# Altium PCB amplifier sp.PcbDoc
Units mil, origin at the board's own origin, x right, y up, seen from the top; angles counter-clockwise.
Board outline 708.66 x 1338.58 mil, 2 copper layers (Top Layer, Bottom Layer); 37 components, 29 nets, 115 pads, 41 vias.
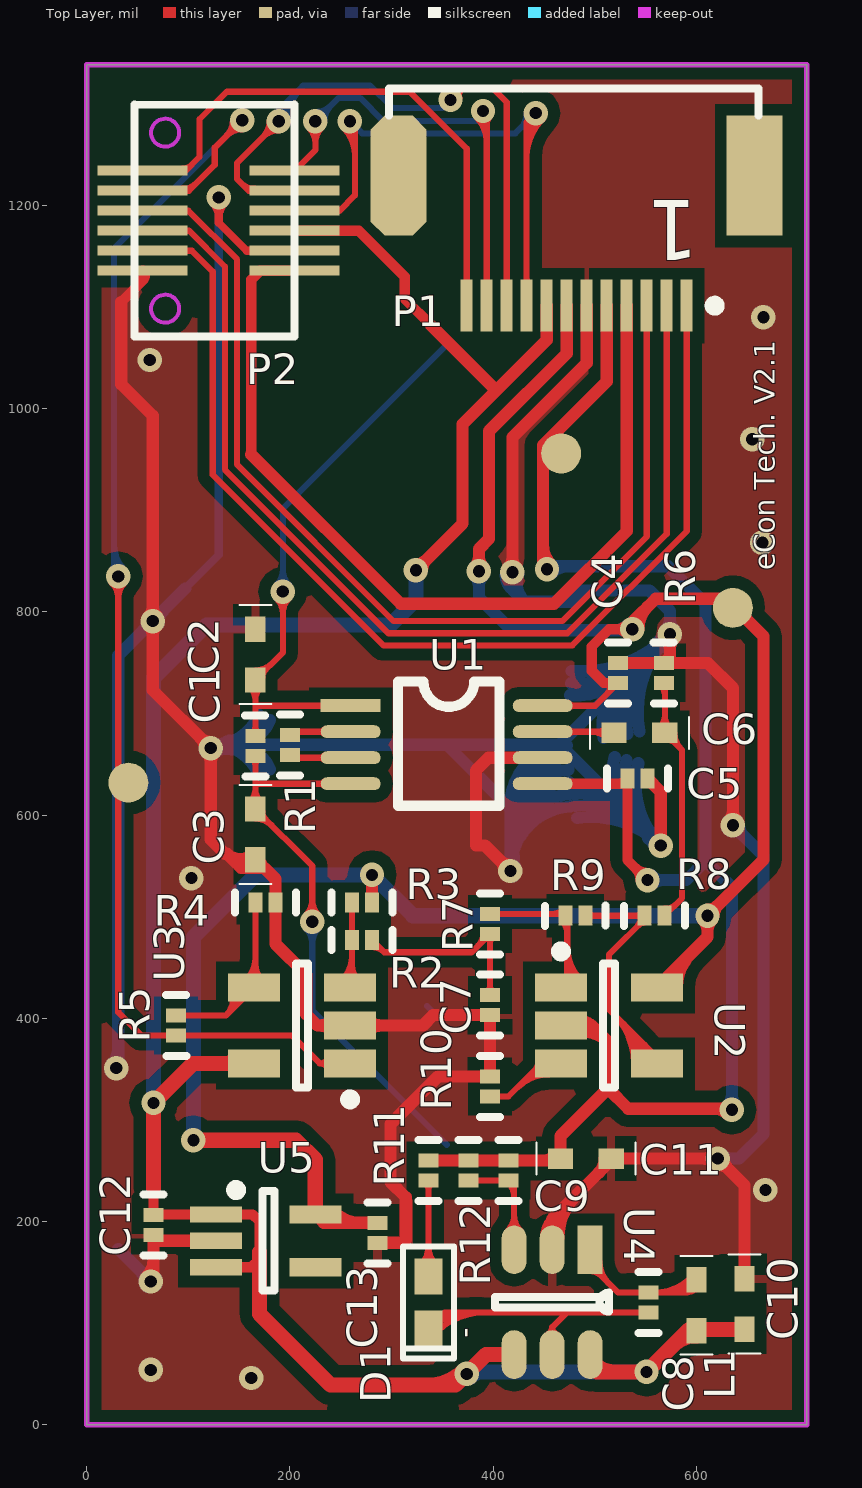
[diagram p0: Top Layer view]
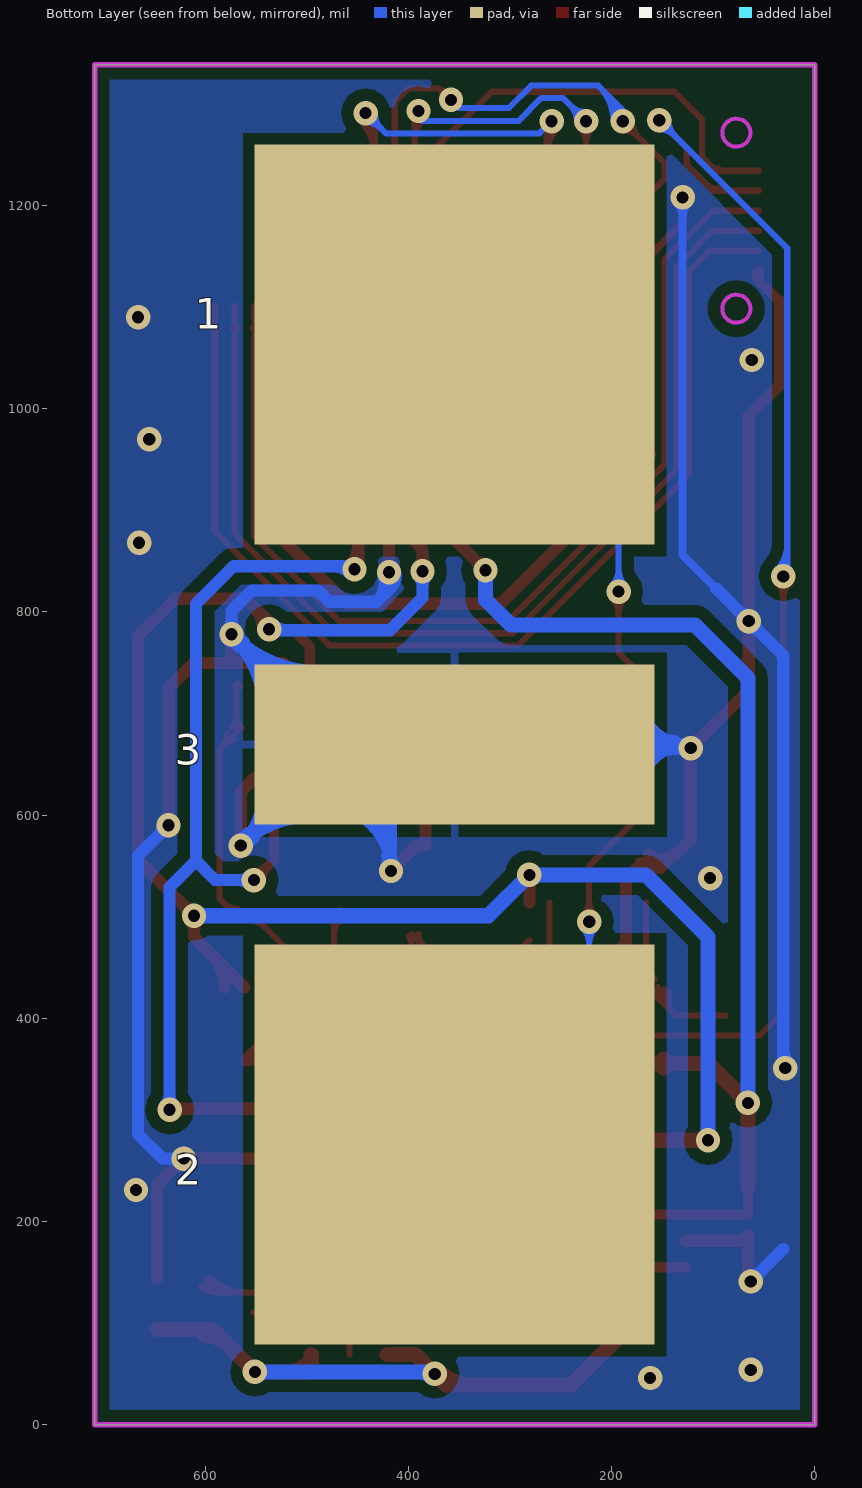
[diagram p1: Bottom Layer view, seen from below]

## Layer stack, top to bottom
Top Layer: signal copper 1.4
Dielectric: dielectric 12.6, FR-4, Dk 4.8
Bottom Layer: signal copper 1.4

## Board outline
0,0 708.66,0 708.66,1338.58 0,1338.58

## Design rules (kind name [scope] priority, off if disabled: settings)
AssemblyTestPointUsage [All] p1 off:
AssemblyTestpoint [All] p1 off: testpointundercomponent=TRUE minsize=40 maxsize=100 preferedsize=60 minholesize=0 maxholesize=40 preferedholesize=32 testpointgrid=1 usegrid=TRUE gridtolerance=0.01 allowsidetop=TRUE allowsidebottom=TRUE
Clearance Clearance_1 [InPolygon] p1: gap=12
Clearance [All] p2: gap=5
ComponentClearance [All] p1 off: gap=10 collisioncheckmode=3 verticalgap=10 showdistances=FALSE
DiffPairsRouting [All] p1 off: maxlimit=10 minlimit=10 mostfreqgap=10 maxuncoupledlength=500
FabricationTestPointUsage [All] p1 off: valid=0 allowmultiple=FALSE
FabricationTestpoint [All] p1 off: side=3 testpointundercomponent=TRUE minsize=40 maxsize=100 preferedsize=60 minholesize=0 maxholesize=40 preferedholesize=32 testpointgrid=1 allowsidetop=TRUE allowsidebottom=TRUE usegrid=TRUE gridtolerance=0.01
FanoutControl Fanout_BGA [IsBGA] p1 off: bgadir=Out bgaviamode=Centered fanoutstyle=Auto fanoutdirection=Alternating viagrid=1 // Fanout_BGA (Default Rule)
FanoutControl Fanout_LCC [IsLCC] p2 off: bgadir=Out bgaviamode=Centered fanoutstyle=Auto fanoutdirection=Alternating viagrid=1 // Fanout_LCC (Default Rule)
FanoutControl Fanout_SOIC [IsSOIC] p3 off: bgadir=Out bgaviamode=Centered fanoutstyle=Auto fanoutdirection=Alternating viagrid=1 // Fanout_SOIC (Default Rule)
FanoutControl Fanout_Small [(CompPinCount < 5)] p4 off: bgadir=Out bgaviamode=Centered fanoutstyle=Auto fanoutdirection=OutThenIn viagrid=1 // Fanout_Small (Default Rule)
FanoutControl Fanout_Default [All] p5 off: bgadir=Out bgaviamode=Centered fanoutstyle=Auto fanoutdirection=Alternating viagrid=1 // Fanout_Default (Default Rule)
Height [All] p1 off: minheight=0 maxheight=1000 prefheight=500
HoleSize [All] p1 off: absolutevalues=TRUE maxlimit=100 minlimit=1 maxpercent=80.000 minpercent=20.000
HoleToHoleClearance [All] p1 off: gap=10 allowstackedmicrovias=TRUE
LayerPairs [All] p1 off: enforce=TRUE
MinimumSolderMaskSliver [All] p1 off: minsoldermaskwidth=10
NetAntennae [All] p1 off: netantennaetolerance=0
PasteMaskExpansion [All] p1 off: expansion=0
PlaneClearance [All] p1 off: clearance=20
PlaneConnect [All] p1 off: planeconnectstyle=Relief reliefexpansion=20 reliefentries=4 reliefconductorwidth=10 reliefairgap=10
PolygonConnect PolygonConnect_1 [(InPadClass('All Pads'))] p1: connectstyle=Relief reliefconductorwidth=8 reliefentries=4 polygonreliefangle="90 Angle" airgapwidth=10
PolygonConnect [All] p2: connectstyle=Direct reliefconductorwidth=10 reliefentries=4 polygonreliefangle="90 Angle" airgapwidth=10
RoutingCorners [All] p1 off: cornerstyle=45-Degree minsetback=100 maxsetback=100
RoutingLayers [All] p1 off: top layer_v5=TRUE bottom layer_v5=TRUE
RoutingPriority [All] p1 off: routingpriority=0
RoutingTopology [All] p1 off: topology=Shortest
RoutingVias [All] p1: holewidth=12 width=24 viastyle="Through Hole" minholewidth=12 minwidth=24 maxholewidth=12 maxwidth=24
SilkToSilkClearance [All] p1 off: silktosilkclearance=10
SilkToSolderMaskClearance SilkscreenOverComponentPads [IsPad] p1 off: minsilkscreentomaskgap=10 clearancetoexposedcopper=TRUE
SolderMaskExpansion [All] p1 off: expansion=4
Width [All] p1: maxlimit=20 minlimit=6 preferedwidth=6
2 further rules are at their usual default settings.

## Components (designator, comment, footprint, x,y, rotation, side; value= is the part's Value field where it differs from the comment)
1 "Electrode" elec-diff 354.33,1062.99 r270 bottom locked
2 "Electrode" elec-diff 354.33,275.59 r270 bottom locked
3 "Electrode" elec-ref 354.33,669.29 r270 bottom locked
C1 "" 0201 166,668 r90 top
C2 "" "0402 - MI" 166,733 r90 top
C3 "" "0402 - MI" 166,556 r90 top
C4 "Cap" 0201 523,740 r90 top
C5 "Cap" 0201 542,636 r180 top
C6 "" "0402 - MI" 569,681 r180 top
C7 "" 0201 397,413 r90 top
C8 "Cap Semi" 0201 552.91,120.2 r270 top
C9 "Cap Semi" 0201 415.11,250.13 r90 top
C10 "Cap Semi" "0402 - MI" 647.39,143.83 r270 top
C11 "Cap Semi" "0402 - MI" 466.29,261.94 r0 top
C12 "" 0201 65.76,196.75 r90 top
C13 "" 0201 286.24,188.87 r90 top
D1 "" D0402 336.37,120.2 r270 top
L1 "Res3" "0402 - MI" 600.15,92.65 r90 top
P1 "" 12P_0.5mm()FPC 472.44,1165.35 r180 top locked
P2 "Header 2 * 6" btb0.5*12top 125.98,1185.04 r90 top locked
R1 "" 0201 200,669 r270 top
R2 "" 0201 271,477 r180 top
R3 "" 0201 271,514 r180 top
R4 "" 0201 176,514 r0 top
R5 "" 0201 88,393 r90 top
R6 "" 0201 568,740 r270 top
R7 "" 0201 397,493 r270 top
R8 "" 0201 558.84,501 r180 top
R9 "" 0201 480.84,501 r180 top
R10 "" 0201 397,333 r270 top
R11 "" 0201 336.37,250.13 r90 top
R12 "" 0201 375.74,250.13 r270 top
U1 "" MSOP-8 354.33,669.29 r0 top locked
U2 "" SOT23-5AM 514,393 r0 top
U3 "" SOT23-5AM 212,393 r180 top
U4 "" LT3843 454.48,120.2 r270 top
U5 "" SC-70-5 176,181 r0 top

## Footprints (in the part's own frame and the unit in brackets; to place one, negate y for a bottom-side part, rotate by r counter-clockwise, add the part's x,y. Pads: shape width x height; smd on the part's side, far side on the other; paste and mask are expansions set on the pad)
12P_0.5mm()FPC [mm] "Connector; FH12 Series; 13 Position; 0.5mm Spaced Bottom Contact"
  rect 0.3x1.3 smd: 1(-3,1.625) 2(-2.5,1.625) 3(-2,1.625) 4(-1.5,1.625) 5(-1,1.625) 6(-0.5,1.625) 7(0,1.625) 8(0.5,1.625) 9(1,1.625) 10(1.5,1.625) 11(2,1.625) 12(2.5,1.625)
  rect 1.4x3 smd: 13(-4.7,-1.625)
  oct 1.4x3 smd: 14(4.2,-1.625)
  silkscreen extent -4.8,-3.81 4.45,1.75
0201 [mm]
  rect 0.35x0.5 smd: 1(-0.25,0) 2(0.25,0)
  silkscreen extent -0.76,-0.25 0.76,0.25
"0402 - MI" [mil]
  rect 25x20 smd: 1(0,0) 2(50,0)
  silkscreen extent -24,-16 74,16
btb0.5*12top [mm]
  rect 0.25x2.25 smd: 1(-1.25,1.8) 2(-0.75,1.8) 3(-0.25,1.8) 4(0.25,1.8) 5(0.75,1.8) 6(1.25,1.8) 7(1.25,-2) 8(0.75,-2) 9(0.25,-2) 10(-0.25,-2) 11(-0.75,-2) 12(-1.25,-2)
  Keep-Out Layer circle w0.1: c-2.2,1.24 r0.35
  Keep-Out Layer circle w0.1: c2.2,1.24 r0.35
  silkscreen extent -2.9,-2 2.9,2.01
D0402 [mm]
  rect 0.9x0.7 smd: 1(-0.65,0) 2(0.65,0)
  silkscreen extent -1.4,-0.64 1.4,0.64
elec-diff [mm] "12*5mm"
  rect 10x10 smd: 1(0,0)
elec-ref [mm] "12*5mm"
  rect 4x10 smd: 1(0,0)
LT3843 [mm]
  rect 1.22x0.62 smd: 1(-1.321,1.041)
  oval 1.22x0.62 smd: 2(-1.321,0.091) 3(-1.321,-0.859) 4(1.299,-0.859) 5(1.299,0.091) 6(1.299,1.041)
  silkscreen extent -0.25,-1.33 0.23,1.52
MSOP-8 [mm]
  rect 1.5x0.325 smd: 1(-2.4,0.975)
  oval 1.5x0.325 smd: 2(-2.4,0.325) 3(-2.4,-0.325) 4(-2.4,-0.975) 5(2.4,-0.975) 6(2.4,-0.325) 7(2.4,0.325) 8(2.4,0.975)
  silkscreen extent -1.22,-1.52 1.32,1.58
SC-70-5 [mil]
  rect 51.18x16 smd: 1(-49,26) 2(-49,0) 3(-49,-26)
  rect 51.18x18 smd: 4(49,-26) 5(49,26)
  silkscreen extent -34,-49 9,55
SOT23-5AM [mm] "SOT23, 5-Leads, Body 2.9x1.7mm, Pitch 0.95mm, Lead Span 2.8mm, IPC Low Density"
  rect 1.3x0.7 smd: 1(-1.2,0.95) 2(-1.2,0) 3(-1.2,-0.95) 4(1.2,-0.95) 5(1.2,0.95)
  silkscreen extent -1.32,-1.55 0.15,1.97, body extent -0.9,-1.55 0.9,1.55, height 1.45

## Part data
C1 C2 C3 C6 C7 C12 C13: library part Cap, "Capacitor"
C4 C5: "Capacitor"
C8 C9 C10 C11: "Capacitor (Semiconductor SIM Model)"
D1: library part Diode, "Default Diode"
L1: "Resistor"
P1 P2: library part "Header 12", "Header, 12-Pin"
R1 R2 R3 R4 R5 R6 R7 R8 R9 R10 R11 R12: library part Res2, "Resistor"
U1: library part INA128UA, "Precision, Low-Power Instrumentation Amplifiers"
U2 U3: library part AD8603
U4: library part LT3483
U5: library part "RT9013 SOT235"

## Free pads (board coordinates)
  round 39.37 smd: 0(467,956) 1(636,804) 2(41,632)

## Via types
v1: diameter 24, hole 12, Top Layer to Bottom Layer, tented both sides, 37 vias
v2: diameter 24, hole 12, Top Layer to Bottom Layer, 4 vias

## Nets (pads, with @x,y where several pads share a name; then routed paths per layer and width w, separated by ;. In a path a pad name is that pad's centre, name@x,y a point inside that pad or via, vN(x,y) a via of type N, cw(c..) or ccw(c..) an arc to the next point about the centre after c; other vN are vias at no path point)
+3.3V: C10.2 C12.2 L1.1 P1.8 P2.10 U3.5 U4.4 U4.6 U5.1 U5.3 | length 2601.4
  Top Layer w10: 65.76,232.24 C12.2 66.17,207 U5.1 163,207 170,200 170,170 ; U5.3 162,155 170,163 ; P2.10 267.8,1175.2 313,1130 313,1108 339,1082
  Top Layer w12: v1@324,837 v1@326,839 ; v1(324,841) 370,887 370,985 452.76,1067.76 P1.8 ; v1@324,847 ccw(c324,861.49) 334.24,851.24 ccw(c344.49,841) v1@330,841 ; 339,1082 403,1018
  Top Layer w15: 65.76,232.24 v1(65.76,316.76) 104.6,355.6 U3.5 ; U3.5@148.5,351.16 ccw(c137.78,340.44) 137.78,355.6 ccw(c137.78,370.76) U3.5@148.5,360.04 ; 170,170 170,163 170,109 240,39 363,39 v1(374,50) 393.06,69.06 U4.4 ; 336.58,39 ccw(c336.58,87.42) v1@370.82,53.18 ; U4.6 495.48,58.52 502,52 v1(551,52) 592.83,93.83 C10.2 ; U4.6@498.81,60.57 ccw(c519.5,81.26) 519.5,52 ; 577.1,78.1 cw(c600.15,55.04) L1.1@600.15,87.65
  Bottom Layer w15: v1(65.76,316.76) 65.76,734.76 118,787 299,787 324,812 v1(324,841) ; v1(374,50) 373,50 375,52 v1(551,52) ; v1@377.18,46.82 cw(c389.69,34.31) 389.69,52
+3.7V: P1.4 P2.12 | length 900.3
  Top Layer w10: 162,955 162,1127 170.83,1135.83 P2.12
  Top Layer w12: 162,955 309,808 460,808 531.5,879.5 P1.4
+VS: C4.1 C13.2 P1.7 pad.1 R3.1 U1.8 U2.5 U5.5 | length 2503.4
  Top Layer w6: U1.8 500.52,707.68 C4.1 ; U1.8@474.35,705.27 cw(c480.15,699.47) 480.15,707.68 cw(c480.15,715.88) U1.8@474.35,710.08 ; 511.32,718.48 ccw(c499.64,730.16) C4.1@516.16,730.16
  Top Layer w10: C4.1 508.84,730.16 497,742 497,766 514,783 v1(537,783) ; v1@532.05,778.05 ccw(c520.1,766.1) 520.1,783 ccw(c520.1,799.9) v1@532.05,787.95
  Top Layer w12: U5.5 233.28,198.72 C13.2 ; U5.5@243.71,209.12 ccw(c268.83,234.24) 268.83,198.72 ; R3.1 v2(280.84,541.16) v2@280.84,541.84 ; v1@381.76,844.24 ccw(c371.51,854.49) 386,854.49 ccw(c400.49,854.49) v1@390.24,844.24 ; v1(386,840) 386,862 396,872 396,978 472.44,1054.44 P1.7 ; v1(537,783) 537,790 560,813 629,813 666,776 666,556 v1(611,501) 611,480.16 U2.5 ; v1@543,783 cw(c574.38,783) 552.19,805.19 ; U2.5@580.83,430.4 cw(c628.13,430.4) 594.69,463.84 ; v1@606.76,496.76 cw(c596.51,486.51) 611,486.51 cw(c625.49,486.51) v1@615.24,496.76 ; v1@611,507 ccw(c611,521.49) 621.24,511.24 ccw(c631.49,501) v1@617,501
  Top Layer w15: v1(105,280) 206,280 225,261 U5.5
  Bottom Layer w12: v2(280.84,541.16) v2@281,541 ; v1@381.76,835.76 cw(c371.51,825.51) 386,825.51 cw(c400.49,825.51) v1@390.24,835.76 ; v1(386,840) 386,814 418,782 537,782 538,783 v1(537,783) ; 520.1,782 ccw(c520.1,799.9) v1@532.76,787.24 ; 524.93,782 cw(c524.93,770.93) v1@532.76,778.76
  Bottom Layer w15: v1(105,280) 105,480 166,541 281,541 321,501 v1(611,501)
-VS: C5.2 C9.2 C11.1 P1.5 pad.0 R11.2 R12.1 U1.5 U2.2 | length 1923.2
  Top Layer w10: U1.5 C5.2@527.06,630.91 ; 522.42,630.91 ccw(c522.42,642.78) C5.2@530.82,634.38 ; C5.2 532.16,555.84 v1(552,536) ; v1@545,536 ccw(c528.1,536) 540.05,547.95 ccw(c552,559.9) v1@552,543
  Top Layer w12: R11.2 R12.1 C9.2 464.32,259.97 C11.1 466.29,284.29 513,331 ; 449,866.14 ccw(c477.14,866.14) v1@457.24,846.24 ; 449.38,259.97 ccw(c449.38,276.35) C11.1@460.96,264.77 ; v1(453,842) 450,842 449,841 449,964 511.81,1026.81 P1.5 ; U2.2 497,393 ; U2.2@477.44,397.07 cw(c483.21,376.29) 498.46,391.54 ; U2.2@480.65,385.5 cw(c489.54,353.54) 513,377 ; U2.2@484.14,387.57 cw(c497,375.05) 497,393 ; U2.2@484.14,398.43 ccw(c497,410.95) 497,393 ; 618.1,311 cw(c618.1,293.1) v1@630.76,305.76 ; 622.93,311 ccw(c622.93,322.07) v1@630.76,314.24 ; v1(635,310) 634,311 533,311 513,331 ; 497,393 513,377 ; 513,331 513,377
  Bottom Layer w12: v1(453,842) 450,842 453,845 572,845 609,808 609,555 ; v1@457.24,837.76 cw(c474.73,820.27) 474.73,845 ; v1(552,536) 590,536 609,555 ; v1@556.24,531.76 cw(c566.49,521.51) 566.49,536 cw(c566.49,550.49) v1@556.24,540.24 ; v1@630.76,314.24 ccw(c620.51,324.49) 635,324.49 ccw(c649.49,324.49) v1@639.24,314.24 ; v1(635,310) 635,529 609,555
GND: 3.1 C2.2 C3.1 C4.2 C5.1 C7.1 C10.1 C11.2 C12.1 C13.1 P1.6 P2.1 P2.11 R4.2 R6.1 R10.1 U1.6 U3.2 U4.2 U5.2 | length 7892.9
  Top Layer w8: v2@124.34,1202.34 cw(c110.69,1188.69) 130,1188.69 cw(c149.31,1188.69) v2@135.66,1202.34 ; v2(130,1208) 130,1183 157.49,1155.51 P2.11
  Top Layer w10: 34,1105 55.12,1126.12 ; P2.1 55.12,1126.12 ; P2.1@55.17,1135.88 cw(c50.21,1131.03) 55.12,1126.12
  Top Layer w12: 34,1105 34,1024 65,993 v1(65,791) 65,723 v1(122,666) 122,576 136,562 138,562 ; v1@58.76,145.24 ccw(c41.84,162.16) 65.76,162.16 ; v1@60.76,786.76 cw(c50.51,776.51) 65,776.51 cw(c79.49,776.51) v1@69.24,786.76 ; v1@60.76,795.24 ccw(c50.51,805.49) 65,805.49 ccw(c79.49,805.49) v1@69.24,795.24 ; v1(63,141) 65.76,143.76 C12.1 71.67,181 U5.2 ; v1@116,666 ccw(c101.51,666) 111.76,676.24 ccw(c122,686.49) v1@122,672 ; v1@117.76,661.76 cw(c107.51,651.51) 122,651.51 cw(c136.49,651.51) v1@126.24,661.76 ; 146.86,553.14 ccw(c159.41,565.69) C3.1@171.41,552.6 ; C3.1@162.28,554.98 cw(c152,559.07) 152,548 ; C3.1@163.3,561.45 cw(c150.94,574.94) 138,562 ; C3.1@166,549.5 cw(c166,531.39) 178.8,544.2 ; U3.2@241.93,387.5 ccw(c228.65,374.22) 228.65,393 ccw(c228.65,411.78) U3.2@241.93,398.5 ; U3.2@276.56,387.5 cw(c289.84,374.22) 289.84,393 cw(c289.84,411.78) U3.2@276.56,398.5 ; C13.1 311.03,179.03 314,182 314,224 299,239 299,296 345.84,342.84 R10.1 C7.1 341.16,403.16 331,393 U3.2 227,393 216,404 216,443 185.84,473.16 R4.2 185.84,537.16 175,548 152,548 ; v1@411,545 ccw(c396.51,545) 406.76,555.24 ccw(c417,565.49) v1@417,551 ; v1@414.76,843.24 ccw(c404.51,853.49) 419,853.49 ccw(c433.49,853.49) v1@423.24,843.24 ; v1(417,545) 392,570 383,570 383,644 395.5,656.5 U1.6 ; v1(419,839) 419,972 492.13,1045.13 P1.6 ; U4.2@452.28,184.02 cw(c481.9,184.02) 460.96,204.96 ; U4.2@453.69,188.4 ccw(c443.1,199) 458.08,199 ccw(c473.06,199) U4.2@462.47,188.4 ; U4.2 458.08,202.08 516.29,260.29 C11.2 v1(621.06,261.94) 647.39,235.61 C10.1 ; U4.2@464.28,184.02 cw(c522.87,184.02) 481.44,225.44 ; 504.03,248.03 ccw(c490.13,261.94) C11.2@509.79,261.94 ; C4.2 R6.1 ; C5.1 565,622.84 v1(565,570) ; v1@569.76,773.76 cw(c559.51,763.51) 574,763.51 cw(c588.49,763.51) v1@578.24,773.76 ; v1(574,778) 574,755.84 R6.1 ; v1@616.82,257.69 ccw(c606.58,247.45) 606.58,261.94 ccw(c606.58,276.42) v1@616.82,266.18 ; v1@621.06,255.94 cw(c621.06,241.45) 631.31,251.69 cw(c641.55,261.94) v1@627.06,261.94 ; v1@631.76,594.24 ccw(c621.51,604.49) 636,604.49 ccw(c650.49,604.49) v1@640.24,594.24 ; v1(636,590) 636,725 611.16,749.84 R6.1 ; 138,562 152,548
  Bottom Layer w8: 97,823 130,856 v2(130,1208) ; v2@124.34,1202.34 cw(c110.69,1188.69) 130,1188.69 cw(c149.31,1188.69) v2@135.66,1202.34
  Bottom Layer w12: v1@24.76,355.24 ccw(c9.69,370.31) 31,370.31 ; 31,173 v1(63,141) ; v1@31,351 31,757 v1(65,791) 97,823 ; v1@57,141 ccw(c42.51,141) 52.76,151.24 ccw(c63,161.49) v1@63,147 ; v1@59,791 cw(c44.51,791) 54.76,780.76 cw(c65,770.51) v1@65,785 ; v1@65,797 ccw(c65,811.49) 75.24,801.24 ccw(c85.49,791) v1@71,791 ; v1(122,666) v1@125.29,669.29 ; v1@125.66,661.25 cw(c137.59,645.75) 142.65,664.64 ; v1@126.24,661.76 cw(c144.43,643.57) 144.43,669.29 ; v1@127.2,663 cw(c146.62,651.79) 140.81,673.45 ; 3.1@169.51,640.3 ccw(c125.29,621.08) v1@125.29,669.29 ; 3.1@169.51,698.28 cw(c125.29,717.5) v1@125.29,669.29 ; 3.1@180.51,645.08 ccw(c143.59,629.04) 143.59,669.29 ccw(c143.59,709.55) 3.1@180.51,693.5 ; v1@412.76,549.24 ccw(c402.51,559.49) 417,559.49 ccw(c431.49,559.49) v1@421.24,549.24 ; v1@413.32,840.93 ccw(c429.23,835.53) 417.35,823.65 ; v1@414,550.2 ccw(c407.17,562.02) 420.36,558.49 ; v1@414.76,834.76 cw(c404.51,824.51) 419,824.51 cw(c433.49,824.51) v1@423.24,834.76 ; v1(417,545) 417,606.62 3.1 ; v1@417,545.94 cw(c479.83,545.94) 3.1@476.07,608.66 ; 417,558.68 cw(c479.07,558.68) 3.1@475.36,620.64 ; 417,571.42 cw(c478.31,571.42) 3.1@474.64,632.62 ; 417,584.16 cw(c477.54,584.16) 3.1@473.92,644.6 ; 3.1@417,596.9 cw(c476.78,596.9) 3.1@473.2,656.57 ; 3.1@417,609.64 cw(c476.02,609.64) 3.1@472.49,668.55 ; v1(419,839) 419,822 431,810 ; 420.67,559.62 ccw(c435.46,555.66) v1@422.2,548 ; v1@424.68,837.07 ccw(c449.62,828.62) 431,810 ; 3.1@475.8,717.92 ccw(c481.22,796.22) 3.1@536.72,740.72 ; 3.1@476.63,729.89 ccw(c483.63,831.09) 555.36,759.36 ; 3.1@477.46,741.86 ccw(c486.04,865.95) v1(574,778) ; 3.1@479.42,621.05 cw(c488.13,560.87) 3.1@531.13,603.87 ; 3.1@481.14,609.18 cw(c492.41,531.29) 548.06,586.94 ; 3.1@482.86,597.3 cw(c496.69,501.7) v1(565,570) ; 3.1@508.6,675.82 cw(c568.12,686.58) 3.1@525.35,729.35 ; 3.1@519.63,657.1 ccw(c577.69,642.11) 3.1@535.29,599.71 ; 3.1@520.4,677.96 cw(c595.59,691.54) 3.1@541.56,745.56 ; 3.1@531.25,654.1 ccw(c601.3,636.01) 550.14,584.86 ; 3.1@532.21,680.09 cw(c623.06,696.5) 557.78,761.78 ; 3.1@542.87,651.1 ccw(c624.91,629.92) v1(565,570) ; 3.1@544.02,682.22 cw(c650.52,701.47) v1(574,778) ; v1@559,570 ccw(c544.51,570) 554.76,580.24 ccw(c565,590.49) v1@565,576 ; v1@559.2,568.45 ccw(c545.21,564.7) 552.45,577.25 ccw(c559.7,589.78) v1@563.45,575.8 ; v1@559.2,571.55 ccw(c545.22,575.3) 557.76,582.54 ccw(c570.3,589.79) v1@566.55,575.8 ; 561.84,770.12 ccw(c553.96,782.28) v1@568.13,779.25 ; 561.85,770.12 cw(c569.72,757.97) v1@572.75,772.13 ; v1@568,778 cw(c553.51,778) 563.76,767.76 cw(c574,757.51) v1@574,772 ; v1@568.17,776.56 cw(c554.12,773.09) 566.51,765.61 cw(c578.91,758.11) v1@575.44,772.17 ; v1@569.76,782.24 ccw(c559.51,792.49) 574,792.49 ccw(c588.49,792.49) v1@578.24,782.24 ; v1(621.06,261.94) 641.94,261.94 666,286 666,560 v1(636,590) ; v1@625.31,257.69 cw(c635.55,247.45) 635.55,261.94 cw(c635.55,276.42) v1@625.31,266.18 ; v1@636,584 cw(c636,569.51) 646.24,579.76 cw(c656.49,590) v1@642,590 ; v1@125.29,669.29 3.1 ; 3.1 3.1@465.71,669.29 ; 431,810 478,810 489,821 554,821 574,801 v1(574,778) ; 3.1@465.71,669.29 465.71,669.71 v1(574,778) ; 3.1@465.71,669.29 v1(565,570)
  other v1: 162,46 63,54 668,231 29,351 103,538 665,868 655,970 62,1048 666,1090
Net1_1: 1.1 C1.2 C2.1 U1.1 | length 706
  Top Layer w6: C2.1@161.05,725.55 cw(c149.1,713.6) 166,713.6 cw(c182.9,713.6) C2.1@170.95,725.55 ; C1.2@163.25,680.59 ccw(c156.61,687.23) 166,687.23 ccw(c175.39,687.23) C1.2@168.75,680.59 ; C1.2 166,707.68 ; C2.1@166,742.5 ccw(c166,765.44) 182.22,749.22 ; C2.1@173,735.5 cw(c183.86,735.5) 176.18,743.18 ; v2@186.64,813.64 cw(c171.27,798.27) 193,798.27 cw(c214.73,798.27) v2@199.36,813.64 ; v2(193,820) 193,760 C2.1 166,707.68 ; U1.1@234.31,705.27 ccw(c228.51,699.47) 228.51,707.68 ccw(c228.51,715.88) U1.1@234.31,710.08 ; U1.1 166,707.68
  Bottom Layer w6: v2@186.64,826.36 ccw(c171.27,841.73) 193,841.73 ccw(c214.73,841.73) v2@199.36,826.36 ; v2(193,820) 193,901.66 1.1
Net2_1: 2.1 C1.1 C3.2 U1.4 | length 737.8
  Top Layer w6: C3.2@161.05,613.45 ccw(c149.1,625.4) 166,625.4 ccw(c182.9,625.4) C3.2@170.95,613.45 ; C1.1@163.25,655.41 cw(c156.61,648.77) 166,648.77 cw(c175.39,648.77) C1.1@168.75,655.41 ; C3.2@166,596.5 cw(c166,573.57) 182.22,589.78 ; C1.1 166,632.08 ; C3.2@173,603.5 ccw(c183.86,603.5) 176.18,595.82 ; v2@215.64,501.36 ccw(c200.27,516.73) 222,516.73 ccw(c243.73,516.73) v2@228.36,501.36 ; v2(222,495) 222,550 C3.2 166,632.08 ; U1.4@234.31,628.5 ccw(c228.51,622.7) 228.51,630.91 ccw(c228.51,639.11) U1.4@234.31,633.31 ; U1.4 167.17,630.91 166,632.08
  Bottom Layer w6: v2@215.64,488.64 cw(c200.27,473.27) 222,473.27 cw(c243.73,473.27) v2@228.36,488.64 ; 2.1@217.26,412.66 ccw(c205.81,424.11) 2.1@222,424.11 ; v2(222,495) 222,407.92 2.1 ; 2.1@335,412 2.1@350,397
NetC6_1: C6.1 R6.2 R8.1 | length 324.6
  Top Layer w6: C6.1@564.05,685.95 ccw(c552.1,697.9) 569,697.9 ccw(c585.9,697.9) C6.1@573.95,685.95 ; R6.2@565.25,727.41 cw(c556.2,718.35) 569,718.35 ; R6.2 569,729.16 C6.1 586,664 586,518.32 R8.1 ; R8.1@568.68,507.84 ccw(c568.68,524.36) 580.37,512.68 ; 569,723.18 cw(c574.98,723.18) R6.2@570.75,727.41 ; C6.1@571.5,674 cw(c571.5,663.14) 579.18,670.82 ; C6.1@578.5,681 ccw(c601.43,681) 585.22,664.78
NetC6_2: C6.2 U1.7 | length 110.1
  Top Layer w6: U1.7 517.91,682.09 C6.2 ; U1.7@474.35,679.68 cw(c480.15,673.88) 480.15,682.09 cw(c480.15,690.29) U1.7@474.35,684.49 ; 496.98,682.09 cw(c496.98,661.48) C6.2@511.55,676.05 ; 502.22,682.09 ccw(c502.22,695.28) C6.2@511.55,685.95
NetC7_2: C7.2 R2.1 R7.2 | length 244.4
  Top Layer w6: R2.1@280.84,470.16 cw(c280.84,453.64) 292.52,465.32 ; R2.1 292.84,465 378.84,465 R7.2 C7.2 ; 385.32,471.48 ccw(c373.64,483.16) R7.2@390.16,483.16 ; C7.2@394.25,425.59 ccw(c387.61,432.23) 397,432.23 ccw(c406.39,432.23) C7.2@399.75,425.59 ; R7.2@394.25,480.41 cw(c387.61,473.77) 397,473.77 cw(c406.39,473.77) R7.2@399.75,480.41
NetC8_1: C8.1 L1.2 U4.1 | length 289.9
  Top Layer w6: U4.1@495.48,151.19 cw(c495.48,135.91) 506.29,146.71 ; U4.1 495.48,157.52 522.95,130.05 C8.1 587.55,130.05 ; U4.1@498.69,160.39 ccw(c513.36,160.39) U4.1@502.98,150.02 ; U4.1@504.68,160.39 ccw(c533.85,160.39) 513.23,139.77 ; C8.1@558.87,130.05 ccw(c558.87,181.43) L1.2@595.2,145.1 ; 573.36,130.05 ccw(c573.36,166.94) L1.2@599.44,140.85 ; 587.84,130.05 ccw(c587.84,152.45) L1.2@603.69,136.61 ; 589.97,132.46 ccw(c582.29,140.15) L1.2@593.15,140.15 ; L1.2@598.66,133.31 ccw(c596.09,121.51) 587.55,130.05 ; L1.2 587.55,130.05
NetC8_2: C8.2 D1.2 U4.5 | length 435
  Top Layer w6: D1.2@335.51,99.41 cw(c361.94,72.98) 361.94,110.36 ; D1.2 352.12,110.36 ; D1.2@339.75,95.17 cw(c376.42,58.5) 376.42,110.36 ; D1.2@340.87,108.35 ccw(c345.05,117.43) 352.12,110.36 ; D1.2@343.99,90.93 cw(c390.91,44.01) 390.91,110.36 ; D1.2@347.15,98.55 cw(c363.67,98.55) 351.99,110.23 ; U4.5@453.81,89.02 ccw(c450.11,96.08) 458.08,96.08 ; U4.5 458.08,96.08 ; U4.5@462.35,89.02 cw(c466.05,96.08) 458.08,96.08 ; C8.2 472.36,110.36 ; 352.12,110.36 472.36,110.36 ; 458.08,96.08 472.36,110.36
NetC9_1: C9.1 R12.2 U4.3 | length 159
  Top Layer w6: R12.2 C9.1 420.68,234.72 U4.3 ; U4.3@414.17,190.52 ccw(c398.45,206.24) 420.68,206.24 ccw(c442.9,206.24) U4.3@427.19,190.52 ; C9.1@415.31,237.53 cw(c402.36,224.58) 420.68,224.58
NetD1_1: D1.1 R11.1 | length 150.1
  Top Layer w6: D1.1@328.75,157.35 ccw(c310.35,175.76) 336.37,175.76 ccw(c362.39,175.76) D1.1@343.99,157.35 ; R11.1@333.62,237.53 cw(c326.98,230.89) 336.37,230.89 cw(c345.76,230.89) R11.1@339.12,237.53 ; D1.1 R11.1
NetR1_1: R1.1 U1.2 | length 74.1
  Top Layer w6: R1.1 203.24,682.09 U1.2 ; U1.2@234.31,679.68 ccw(c228.51,673.88) 228.51,682.09 ccw(c228.51,690.29) U1.2@234.31,684.49
NetR1_2: R1.2 U1.3 | length 73.8
  Top Layer w6: R1.2 202.66,656.5 U1.3 ; U1.3@234.31,654.09 ccw(c228.51,648.29) 228.51,656.5 ccw(c228.51,664.7) U1.3@234.31,658.9
NetR2_2: R2.2 R3.2 U3.3 | length 139.5
  Top Layer w6: U3.3@251.62,438.02 ccw(c228.6,461.04) 261.16,461.04 ; U3.3@255.86,433.78 ccw(c243.09,446.56) 261.16,446.56 ; U3.3 261.16,432.31 R2.2 R3.2 ; 261.16,451.81 ccw(c280.65,451.81) U3.3@266.87,438.02
NetR4_1: R4.1 R5.2 U3.4 | length 288.4
  Top Layer w6: R5.2 137.2,402.84 ; U3.4@142.75,426.89 cw(c120.73,419.31) 137.2,402.84 ; 143.99,409.63 ccw(c130.83,422.79) U3.4@148.43,428.85 ; 150.78,416.42 ccw(c140.94,426.27) U3.4@154.1,430.8 ; U3.4@157.13,438.02 ccw(c135.35,459.81) 166.16,459.81 ; U3.4@161.38,433.78 ccw(c149.83,445.32) 166.16,445.32 ; 166.16,453.04 ccw(c187.4,453.04) U3.4@172.38,438.02 ; R4.1 166.16,431.8 U3.4 137.2,402.84
NetR7_1: R7.1 R9.2 U2.1 | length 231.2
  Top Layer w6: R7.1 469.16,502.84 R9.2 473,499 473,436.65 U2.1 ; 458.93,502.84 ccw(c458.93,516.02) R9.2@468.25,506.7 ; R9.2@468.25,495.3 cw(c456.78,483.83) 473,483.83 ; 473,455.38 ccw(c503.55,455.38) U2.1@481.95,433.78 ; 473,469.87 ccw(c518.03,469.87) U2.1@486.19,438.02
NetR8_2: R8.2 R9.1 U2.4 | length 433.9
  Top Layer w6: R9.1 R8.2 549.71,501 551,499.71 514,462.71 514,409 561.24,361.76 U2.4 ; R9.1@493.44,498.25 cw(c500.08,491.61) 500.08,501 cw(c500.08,510.39) R9.1@493.44,503.75 ; 518.33,404.67 cw(c469.25,355.6) U2.4@538.65,355.6 ; 528.57,394.43 cw(c489.73,355.6) U2.4@544.65,355.6 ; 538.81,384.19 cw(c510.22,355.6) U2.4@550.65,355.6 ; 542.12,490.83 ccw(c534.9,498.05) R8.2@545.11,498.05 ; R8.2@542.94,491.65 cw(c549,485.58) R8.2@549,494.16 ; R8.2@546.25,498.25 ccw(c539.61,491.61) 539.61,501 ccw(c539.61,510.39) R8.2@546.25,503.75 ; 549.05,373.95 cw(c530.71,355.6) U2.4@556.65,355.6
NetR10_2: R10.2 U2.3 | length 147.1
  Top Layer w6: R10.2 415.16,323.16 447.6,355.6 U2.3 ; 424,332 cw(c454.94,301.06) U2.3@454.94,344.82 ; 434.24,342.24 cw(c454.94,321.54) U2.3@454.94,350.82 ; U2.3@441.74,349.74 ccw(c435.88,355.6) U2.3@444.17,355.6
V1: P1.9 P2.9 | length 725.5
  Top Layer w6: P2.9 248.88,1194.88 264,1210 264,1278 v1(259,1283) ; v1@252.64,1276.64 cw(c225.2,1249.2) 264,1249.2 ; v1@256.88,1280.88 cw(c239.69,1263.69) 264,1263.69 ; P1.9@431.02,1123.12 ccw(c426.23,1127.91) 433,1127.91 ; 433,1128.25 ccw(c440.26,1128.25) P1.9@435.13,1123.12 ; 433,1247.54 cw(c485.46,1247.54) v1@448.36,1284.64 ; 433,1262.03 cw(c470.97,1262.03) v1@444.12,1288.88 ; 433,1276.51 cw(c456.49,1276.51) v1@439.88,1293.12 ; P1.9 433,1101.45 433,1282 ; v1@433.88,1287.12 cw(c429.82,1285.18) 433,1282 ; v1@438.12,1282.88 ccw(c436.18,1278.82) 433,1282 ; v1(442,1291) 433,1282
  Bottom Layer w6: v1(259,1283) 271,1271 422,1271 v1(442,1291) ; v1@433,1291 cw(c411.27,1291) 426.64,1275.64 cw(c442,1260.27) v1@442,1282
V2: P1.10 P2.8 | length 763.6
  Top Layer w6: 151.97,1222.03 ccw(c165.35,1235.42) P2.8@165.35,1216.49 ; v1@180,1283 cw(c158.27,1283) 173.64,1267.64 cw(c189,1252.27) v1@189,1274 ; v1(189,1283) 148,1242 148,1226 159.43,1214.57 P2.8 ; v1(358,1304) 369.35,1315.35 ; v1@360.11,1312.75 ccw(c362.41,1322.3) 369.35,1315.35 ; v1@366.75,1306.11 cw(c376.3,1308.41) 369.35,1315.35 ; P1.10@411.33,1123.12 ccw(c406.37,1128.08) 413.39,1128.08 ccw(c420.4,1128.08) P1.10@415.44,1123.12 ; P1.10 413.39,1301.61 399.65,1315.35 369.35,1315.35
  Bottom Layer w6: v1@186,1283 cw(c205.31,1283) 191.66,1296.66 ; v1(189,1283) 189,1294 213,1318 279,1318 301,1296 350,1296 v1(358,1304) ; v1@192,1283 cw(c225.8,1283) 201.9,1306.9 ; v1@198,1283 cw(c246.28,1283) 212.14,1317.14
V3: P1.11 P2.7 | length 571.3
  Top Layer w6: P2.7 225,1254.53 v1(225,1283) ; v1@218.64,1276.64 cw(c203.27,1261.27) 225,1261.27 cw(c246.73,1261.27) v1@231.36,1276.64 ; v1@383.64,1286.64 cw(c359.34,1262.34) 393.7,1262.34 ; v1@387.88,1290.88 cw(c373.82,1276.82) 393.7,1276.82 ; P1.11@391.65,1123.12 ccw(c386.69,1128.08) 393.7,1128.08 ccw(c400.72,1128.08) P1.11@395.76,1123.12 ; P1.11 v1@393.7,1286.3 ; 393.7,1280.21 cw(c402.79,1280.21) v1@396.36,1286.64
  Bottom Layer w6: v1(225,1283) 248,1306 269,1306 292,1283 386,1283 396,1293 v1(390,1293) ; v1@225,1292 ccw(c225,1313.73) 240.36,1298.36 ccw(c255.73,1283) v1@234,1283
V4: P1.12 P2.6 | length 570.5
  Top Layer w6: P2.6 97.25,1234.25 111,1248 111,1285 138,1312 318,1312 374.02,1255.98 P1.12 ; P2.6@94.49,1236.17 ccw(c94.49,1247.48) 102.49,1239.49 ; P1.12@371.96,1123.12 ccw(c367,1128.08) 374.02,1128.08 ccw(c381.03,1128.08) P1.12@376.07,1123.12
V5: P2.5 pad.2 R5.1 U3.1 | length 1506.6
  Top Layer w6: v1@24.64,828.64 cw(c9.27,813.27) 31,813.27 cw(c52.73,813.27) v1@37.36,828.64 ; v1(31,835) 31,406 53.84,383.16 R5.1 201.84,383.16 229.4,355.6 ; P2.5 100.57,1214.57 126,1240 126,1257 v1(153,1284) ; P2.5@94.49,1216.49 ccw(c94.49,1235.8) 108.15,1222.14 ; v1@144,1284 cw(c122.27,1284) 137.64,1268.64 cw(c153,1253.27) v1@153,1275 ; U3.1@237.94,350.5 ccw(c229.4,345.91) 229.4,355.6 ; U3.1@237.94,360.7 cw(c229.4,365.29) 229.4,355.6 ; U3.1 229.4,355.6
  Bottom Layer w6: v1@24.64,841.36 ccw(c18.93,847.07) 27,847.07 ; 27,851.9 ccw(c47.9,851.9) v1@33.12,837.12 ; 27,866.38 ccw(c62.38,866.38) v1@37.36,841.36 ; v1(31,835) 27,839 27,1158 v1(153,1284) ; v1@144,1284 cw(c122.27,1284) 137.64,1268.64 cw(c153,1253.27) v1@153,1275
V6: P1.3 P2.4 | length 1054.4
  Top Layer w6: P2.4 100.12,1194.88 148,1147 148,944.96 301.96,791 468.03,791 551.18,874.15 P1.3 ; P1.3@549.13,1079.64 cw(c544.17,1074.68) 551.18,1074.68 cw(c558.2,1074.68) P1.3@553.24,1079.64
V7: P1.2 P2.3 | length 1073.1
  Top Layer w6: P2.3 100.8,1175.2 136,1140 136,939.99 296.99,779 473,779 570.87,876.87 P1.2 ; P1.2@568.81,1079.64 cw(c563.85,1074.68) 570.87,1074.68 cw(c577.88,1074.68) P1.2@572.92,1079.64
V8: P1.1 P2.2 | length 1093
  Top Layer w6: P2.2 103.49,1155.51 124,1135 124,935.02 292.02,767 477.97,767 590.55,879.58 P1.1 ; P1.1@588.5,1079.64 cw(c583.54,1074.68) 590.55,1074.68 cw(c597.57,1074.68) P1.1@592.61,1079.64
pads on no net: P1.13 P1.14 U5.4

## Polygon pours and split planes (outlines as drawn)
GND on Top Layer "G" (solid, remove dead copper, pour order 4): 0,1338.58 708.66,1338.58 708.66,0 0,0
GND on Bottom Layer "G" (solid, remove dead copper, pour order 3): 0,1338.58 708.66,1338.58 708.66,0 0,0

## Keep-outs
Keep-Out Layer:
  the board outline again, w5

## Silkscreen, mask and mechanical layers (free items; w line width, h text height)
Top Overlay:
  text "eCon Tech. V2.1" at 677,841 h20 r90
Mechanical 1:
  the board outline again, w10

## Text inside footprints (layer, text, board x,y; h text height)
D1: Top Overlay "-" at 366.37,95.2 h20 r270
P1: Top Overlay "1" at 602.44,1205.35 h59.06 r180